# Altium PCB PCB_CSN_V5.PcbDoc
Units mm, origin at the board's own origin, x right, y up, seen from the top; angles counter-clockwise.
Board outline 50 x 20 mm, 4 copper layers (Top Layer, G1, GP1, Bottom Layer); 84 components, 60 nets, 232 pads, 34 vias.
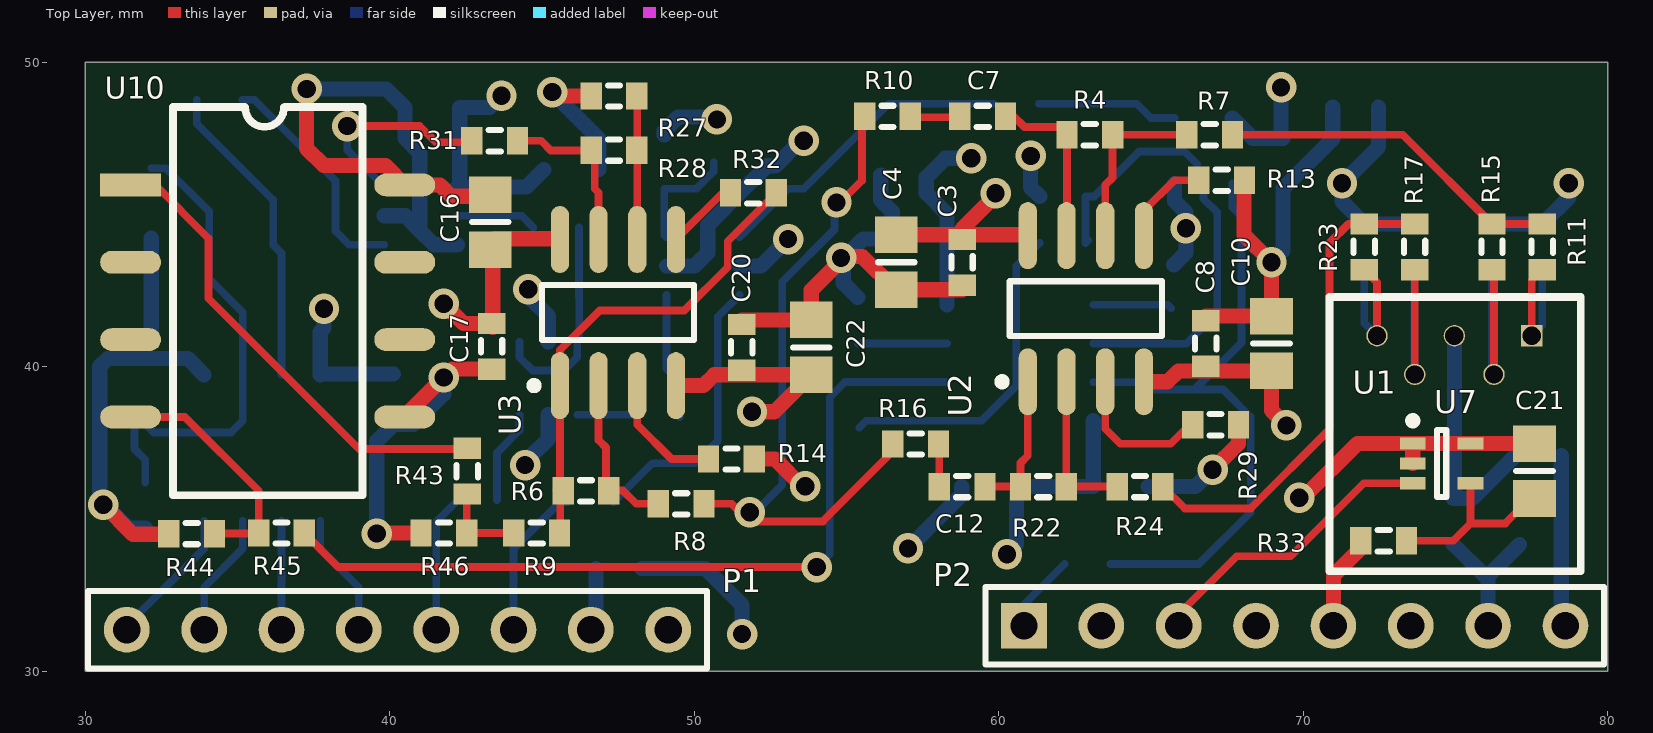
[diagram p0: Top Layer view]
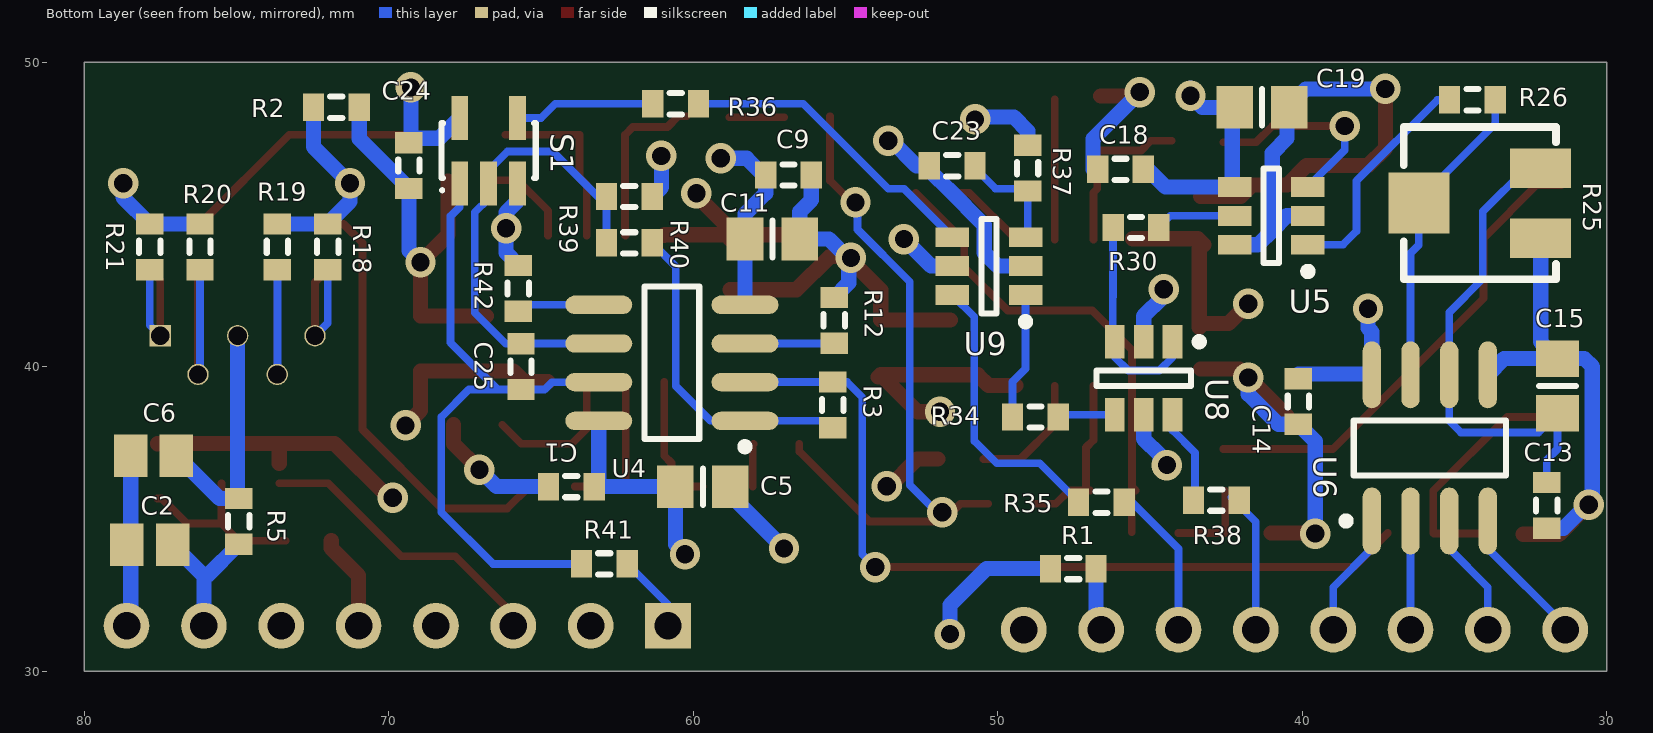
[diagram p1: Bottom Layer view, seen from below]
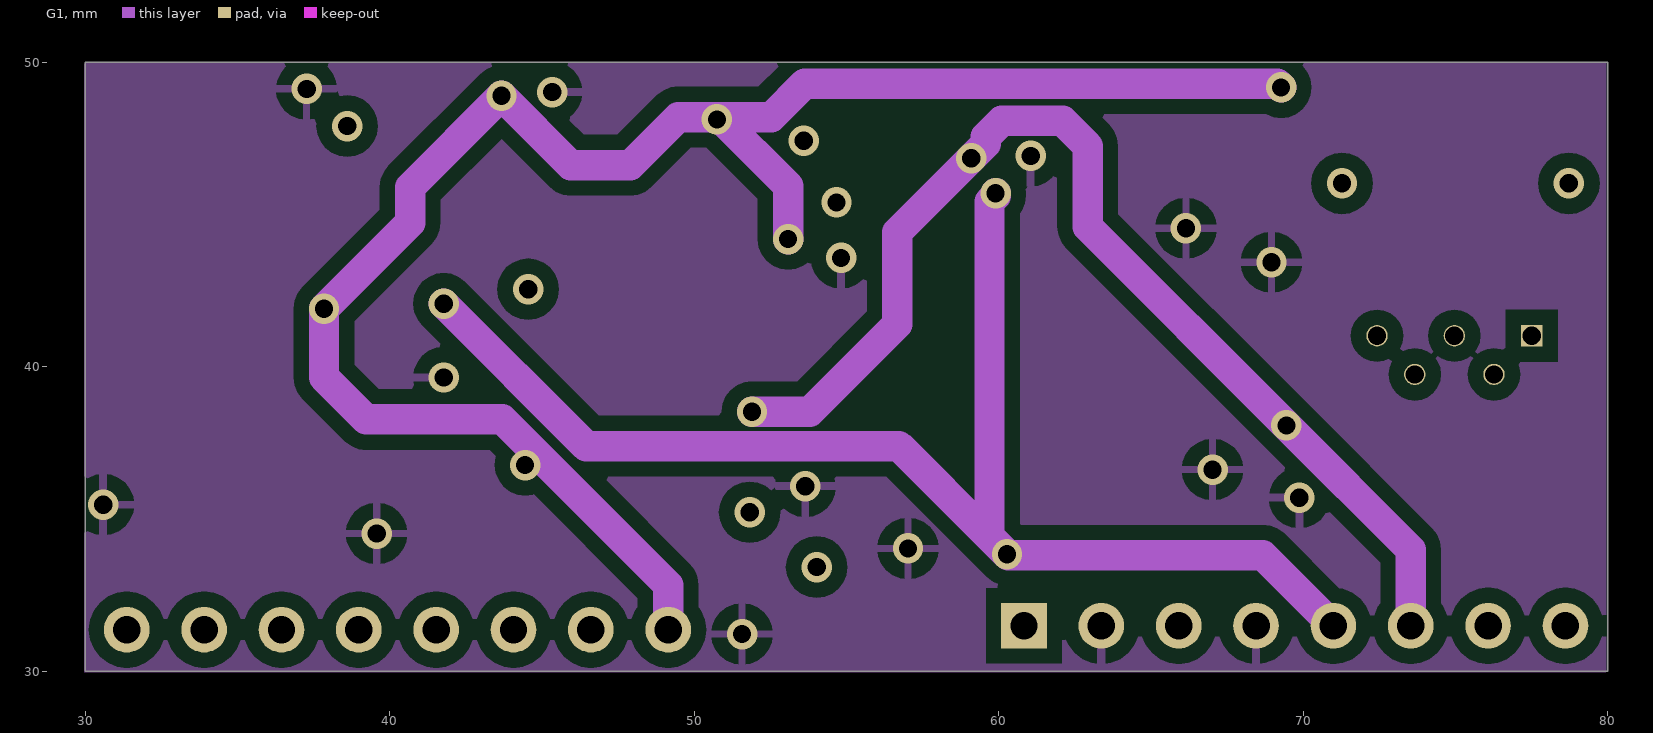
[diagram p2: G1]
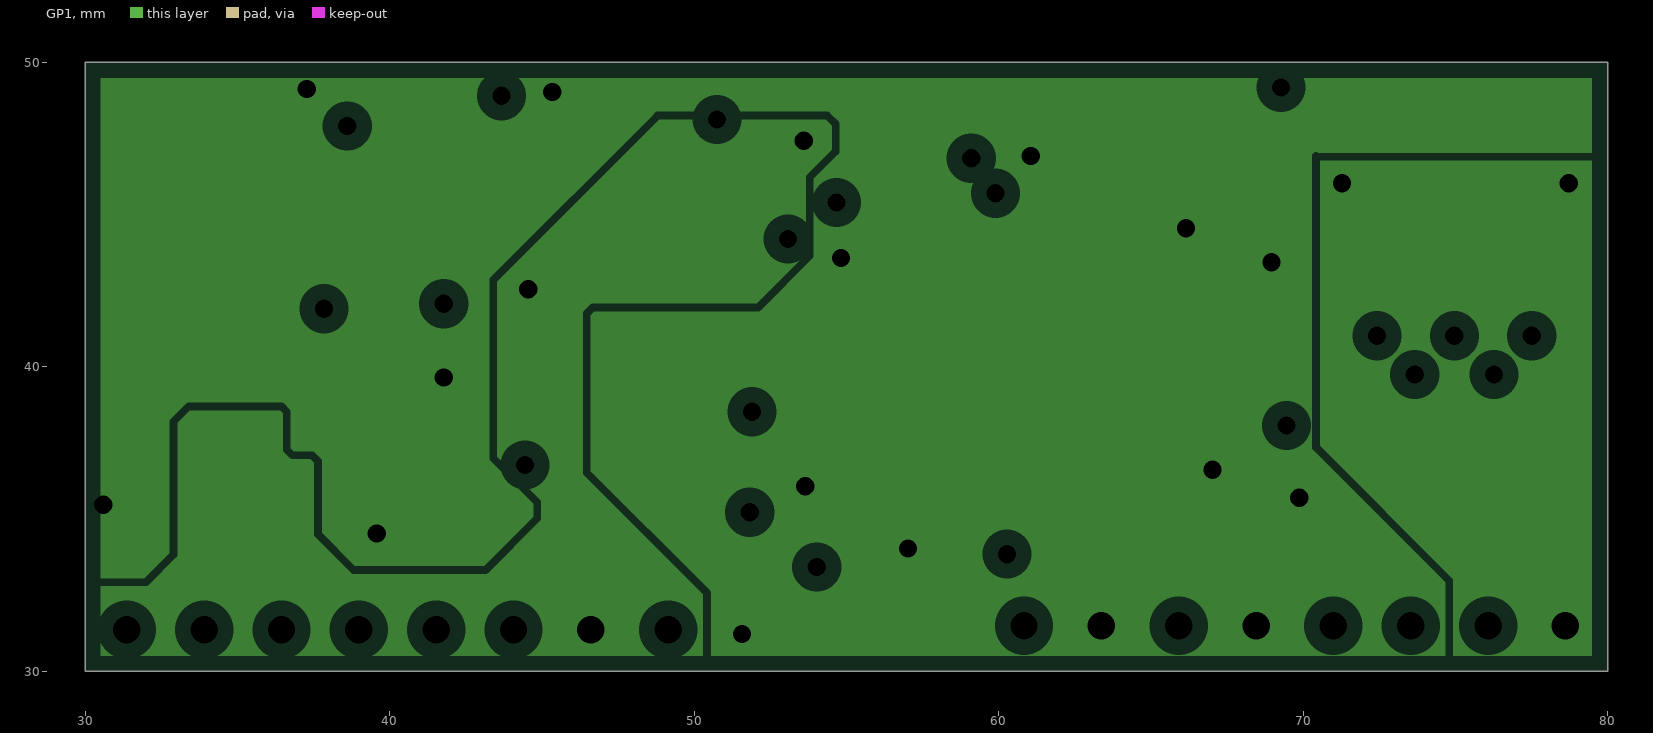
[diagram p3: GP1, clearances drawn from the general rule]

## Layer stack, top to bottom
Top Layer: signal copper 0.0356
Dielectric: core 0.32, FR-4, Dk 4.8
G1: signal copper 0.0356
Dielectric: prepreg 0.32, FR-4, Dk 4.8
GP1: plane copper 0.0356, net (Multiple Nets)
Dielectric: core 0.32, FR-4, Dk 4.8
Bottom Layer: signal copper 0.0356

## Board outline
30,30 30,50 80,50 80,30

## Design rules (kind name [scope] priority, off if disabled: settings)
Clearance Clearance_1 [InNamedPolygon('gnd_top')] p1: gap=0.5
Clearance [All] p2: gap=0.127
ComponentClearance ComponentClearance_1 [InComponentClass('Temp_Sens') vs InComponent('U1')] p1: gap=0 collisioncheckmode=3 verticalgap=0 showdistances=FALSE
ComponentClearance [All] p2: gap=0.254 collisioncheckmode=3 verticalgap=0.254 showdistances=FALSE
MinimumSolderMaskSliver MinimumSolderMaskSliver_1 [(HasFootprint('MAA05A_N') OR HasFootprint('SOT23-5') OR HasFootprint('SOT23-6_N'))] p1: minsoldermaskwidth=0.06
MinimumSolderMaskSliver [All] p2: minsoldermaskwidth=0.127
PlaneClearance [All] p1: clearance=0.508
PlaneConnect [All] p1: planeconnectstyle=Relief reliefexpansion=0.508 reliefentries=4 reliefconductorwidth=0.254 reliefairgap=0.254
PolygonConnect [All] p1: connectstyle=Relief reliefconductorwidth=0.254 reliefentries=4 polygonreliefangle="90 Angle"
RoutingVias [All] p1: holewidth=0.6 width=1 viastyle="Through Hole" minholewidth=0.6 minwidth=1 maxholewidth=0.6 maxwidth=1
SilkscreenOverComponentPads SilkscreenOverComponentPads_1 [(InPadClass('Pads_Res_Cond') OR HasFootprint('6-0805_N') OR HasFootprint('J1-0603')OR HasFootPrint('SOT23-5')) vs (OnLayer('Top Overlay') OR OnLayer('Bottom Overlay'))] p1: minsilkscreentomaskgap=0.06
SilkscreenOverComponentPads [All] p2: minsilkscreentomaskgap=0.254
SolderMaskExpansion SolderMaskExpansion_1 [(HasFootprint('SOT23-5') OR HasFootprint('MAA05A_N') OR HasFootprint('SOT23-6_N'))] p1: expansion=0.05
SolderMaskExpansion [All] p2: expansion=0.102
Width Width_1 [(InNet('-5') OR InNet('+3.3') OR InNet('+5') OR InNet('70_GND') OR InNet('+70V') OR InNet('DGND') OR InNet('GND')OR InNet('NetC6_2'))] p1: maxlimit=1 minlimit=0.5 preferedwidth=1 toplayer_maxwidth=0.5 toplayer_prefwidth=0.5 midlayer1_minwidth=1 bottomlayer_maxwidth=0.5 bottomlayer_prefwidth=0.5 minimp=50.000000 maximp=50.000000 favimp=50.000000
Width [All] p2: maxlimit=0.254 minlimit=0.254 preferedwidth=0.254
23 further rules are at their usual default settings.

## Classes and differential pairs
component class Logica_ADC: C23 C24 C25 P1 P2 R34 R35 R36 R37 R38 R39 R40 R41 R42 S1 U8 U9
component class Acond_Elec: C1 C2 C3 C4 C5 C6 C7 C8 C9 C10 C11 C12 C13 C14 C15 C16 C17 C18 C19 C20 C21 C22 R1 R2 R3 R4 R5 R6 R7 R8 R9 R10 R11 R12 R13 R14 R15 R16 R17 R18 R19 R20 R21 R22 R23 R24 R25 R26 R27 R28 R29 R30 R31 R32 R33 R43 R44 R45 R46 U1 U2 U3 U4 U5 U6 U7 U10
pad class Pads_Res_Cond: C1-1 C1-2 C2-1 C2-2 C3-1 C3-2 C4-1 C4-2 C5-1 C5-2 C6-1 C6-2 C7-1 C7-2 C8-1 C8-2 C9-1 C9-2 C10-1 C10-2 C11-1 C11-2 C12-1 C12-2 C13-1 C13-2 C14-1 C14-2 C15-1 C15-2 C16-1 C16-2 C17-1 C17-2 C18-1 C18-2 C19-1 C19-2 C20-1 C20-2 C21-1 C21-2 C22-1 C22-2 C23-1 C23-2 C24-1 C24-2 C25-1 C25-2 R1-1 R1-2 R2-1 R2-2 R3-1 R3-2 R4-1 R4-2 R5-1 R5-2 R6-1 R6-2 R7-1 R7-2 R8-1 R8-2 R9-1 R9-2 R10-1 R10-2 R11-1 R11-2 R12-1 R12-2 R13-1 R13-2 R14-1 R14-2 R15-1 R15-2 R16-1 R16-2 R17-1 R17-2 R18-1 R18-2 R19-1 R19-2 R20-1 R20-2 R21-1 R21-2 R22-1 R22-2 R23-1 R23-2 R24-1 R24-2 R25-CCW R25-CW R25-W R26-1 R26-2 R27-1 R27-2 R28-1 R28-2 R29-1 R29-2 R30-1 R30-2 R31-1 R31-2 R32-1 R32-2 R33-1 R33-2 R34-1 R34-2 R35-1 R35-2 R36-1 R36-2 R37-1 R37-2 R38-1 R38-2 R39-1 R39-2 R40-1 R40-2 R41-1 R41-2 R42-1 R42-2 R43-1 R43-2 R44-1 R44-2 R45-1 R45-2 R46-1 R46-2

## Components (designator, comment, footprint, x,y, rotation, side; value= is the part's Value field where it differs from the comment)
C1 "Cap" J1-0603 64.008,36.068 r180 bottom
C2 "Cap" C0805 77.851,34.163 r180 bottom
C3 "Cap" J1-0603 58.801,43.434 r90 top
C4 "Cap Pol3" 6-0805_N 56.642,43.434 r270 top
C5 "Cap Pol3" 6-0805_N 59.69,36.068 r180 bottom
C6 "Cap" C0805 77.724,37.084 r180 bottom
C7 "Cap" J1-0603 59.475,48.225 r180 top
C8 "Cap" J1-0603 66.802,40.767 r270 top
C9 "Cap" J1-0603 56.875,46.3 r180 bottom
C10 "Cap Pol3" 6-0805_N 68.961,40.767 r270 top
C11 "Cap Pol3" 6-0805_N 57.404,44.196 r0 bottom
C12 "Cap" J1-0603 58.801,36.068 r180 top
C13 "Cap" J1-0603 31.975,35.45 r270 bottom
C14 "Cap" J1-0603 40.132,38.862 r270 bottom
C15 "Cap Pol3" 6-0805_N 31.623,39.37 r90 bottom
C16 "Cap Pol3" 6-0805_N 43.3,44.75 r90 top
C17 "Cap" J1-0603 43.35,40.675 r90 top
C18 "Cap" J1-0603 45.974,46.482 r180 bottom
C19 "Cap Pol3" 6-0805_N 41.325,48.525 r180 bottom
C20 "Cap" J1-0603 51.562,40.64 r90 top
C21 "Cap" 6-0805_N 77.597,36.576 r270 top
C22 "Cap Pol3" 6-0805_N 53.848,40.64 r270 top
C23 "Cap" J1-0603 51.5,46.6 r180 bottom
C24 "Cap" J1-0603 69.342,46.609 r90 bottom
C25 "Cap" J1-0603 65.659,40.005 r270 bottom
P1 "Header 8" HDR1X8#1 31.369,31.369 r0 top
P2 "Header 8" HDR1X8#2 60.833,31.496 r0 top
R1 "Res3" J1-0603 47.525,33.375 r180 bottom
R2 "Res3" J1-0603 71.725,48.525 r0 bottom
R3 "Res3" J1-0603 55.425,38.75 r270 bottom
R4 "Res3" J1-0603 62.992,47.625 r0 top
R5 "Res3" J1-0603 74.93,34.925 r270 bottom
R6 "Res3" J1-0603 46.45,35.925 r0 top
R7 "Res3" J1-0603 66.929,47.625 r180 top
R8 "Res3" J1-0603 49.575,35.5 r180 top
R9 "Res3" J1-0603 44.831,34.544 r180 top
R10 "Res3" J1-0603 56.35,48.225 r180 top
R11 "Res3" J1-0603 77.851,43.942 r90 top
R12 "Res3" J1-0603 55.372,41.529 r270 bottom
R13 "Res3" J1-0603 67.325,46.125 r180 top
R14 "Res3" J1-0603 51.225,36.975 r180 top
R15 "Res3" J1-0603 76.2,43.942 r90 top
R16 "Res3" J1-0603 57.277,37.465 r180 top
R17 "Res3" J1-0603 73.66,43.942 r90 top
R18 "Res3" J1-0603 72.009,43.942 r270 bottom
R19 "Res3" J1-0603 73.66,43.942 r270 bottom
R20 "Res3" J1-0603 76.2,43.942 r270 bottom
R21 "Res3" J1-0603 77.851,43.942 r270 bottom
R22 "Res3" J1-0603 61.468,36.068 r0 top
R23 "Res3" J1-0603 72.009,43.942 r90 top
R24 "Res3" J1-0603 64.643,36.068 r180 top
R25 "RPot SM" POT4MM-2 34.175,45.375 r0 bottom
R26 "Res3" J1-0603 34.417,48.768 r180 bottom
R27 "Res3" J1-0603 47.371,48.895 r180 top
R28 "Res3" J1-0603 47.371,47.117 r180 top
R29 "Res3" J1-0603 67.125,38.1 r180 top
R30 "Res3" J1-0603 45.466,44.577 r180 bottom
R31 "Res3" J1-0603 43.45,47.425 r180 top
R32 "Res3" J1-0603 51.943,45.72 r180 top
R33 "Res3" J1-0603 72.644,34.29 r180 top
R34 "Res3" J1-0603 48.768,38.354 r0 bottom
R35 "Res3" J1-0603 46.6,35.55 r180 bottom
R36 "Res3" J1-0603 60.579,48.641 r0 bottom
R37 "Res3" J1-0603 49.025,46.525 r90 bottom
R38 "Res3" J1-0603 42.825,35.625 r0 bottom
R39 "Res3" J1-0603 62.103,45.593 r180 bottom
R40 "Res3" J1-0603 62.103,44.069 r0 bottom
R41 "Res3" J1-0603 62.925,33.528 r180 bottom
R42 "Res3" J1-0603 65.75,42.575 r270 bottom
R43 "Res3" J1-0603 42.55,36.575 r90 top
R44 "Res3" J1-0603 33.5,34.525 r0 top
R45 "Res3" J1-0603 36.449,34.544 r0 top
R46 "Res3" J1-0603 41.783,34.544 r0 top
S1 "SN74LVC1G66DBVR" SOT23-5 66.725,47.1 r180 bottom (schematic designator Switch1)
U1 "MPPC_S10985" S10985_HAM 70.866,42.291 r0 top
U2 "THS4062" SO-8_N 62.865,41.91 r90 top
U3 "THS4062" SO-8_N 47.498,41.783 r90 top
U4 "THS4062" SO-8_N 60.706,40.132 r0 bottom
U5 "TLV3501" SOT23-6_N 41.021,44.958 r0 bottom
U6 "TLV5624" SO8_N 35.814,37.338 r90 bottom
U7 "LM94021BIMG" MAA05A_N 74.549,36.83 r0 top
U8 "SN74LVC2G17" SOT23-6_N 45.212,39.624 r270 bottom
U9 "SN74LVC1G175" SOT23-6_N 50.292,43.307 r0 bottom
U10 "Delay" AMZ-G-SMD 31.496,45.974 r0 top

## Footprints (in the part's own frame and the unit in brackets; to place one, negate y for a bottom-side part, rotate by r counter-clockwise, add the part's x,y. Pads: shape width x height; smd on the part's side, far side on the other; paste and mask are expansions set on the pad)
6-0805_N [mm] "Chip Resistor, Body 2.0x1.2mm, IPC Medium Density"
  rect 1.2x1.4 smd: 1(-0.9,0) 2(0.9,0)
  silkscreen extent 0,-0.6 0,0.6, body extent -1.07,-0.7 1.07,0.7, height 0.7
AMZ-G-SMD [mm]
  rect 2x0.75 smd: 1(0,0)
  oval 2x0.75 smd: 2(0,-2.54) 3(0,-5.08) 4(0,-7.62) 5(9,-7.62) 6(9,-5.08) 7(9,-2.54) 8(9,0)
  silkscreen extent 1.39,-10.19 7.61,2.56
C0805 [mm] "Chip Capacitor, Body 2.0x1.3mm, IPC High Density"
  rect 1.1x1.4 smd: 1(-0.75,0) 2(0.75,0)
  body extent -1.1,-0.72 1.1,0.72, height 1.4
HDR1X8#1 [mm] "Connector; Header; 8 Position"
  round 1.5 hole 0.9: 1(0,0) 2(2.54,0) 3(5.08,0) 4(7.62,0) 5(10.16,0) 6(12.7,0) 7(15.24,0) 8(17.78,0)
  silkscreen extent -1.27,-1.27 19.05,1.27
HDR1X8#2 [mm] "Connector; Header; 8 Position"
  rect 1.5x1.5 hole 0.9: 1(0,0)
  round 1.5 hole 0.9: 2(2.54,0) 3(5.08,0) 4(7.62,0) 5(10.16,0) 6(12.7,0) 7(15.24,0) 8(17.78,0)
  silkscreen extent -1.27,-1.27 19.05,1.27
J1-0603 [mm] "Chip Resistor, Body 1.6x0.8mm, IPC High Density"
  rect 0.7x0.9 smd: 1(-0.75,0) 2(0.75,0)
  silkscreen extent -0.2,-0.35 0.2,0.35, body extent -0.85,-0.48 0.85,0.48, height 0.9
MAA05A_N [mm] "SOT353, 5-Leads, Body 2x1.3mm, Pitch 0.65mm, Lead Span 2.1mm, IPC Medium Density"
  rect 0.85x0.4 smd: 1(-0.95,0.65) 2(-0.95,0) 3(-0.95,-0.65) 4(0.95,-0.65) 5(0.95,0.65)
  silkscreen extent -1.07,-1.1 0.15,1.52, body extent -0.7,-1.1 0.7,1.1, height 1.1
POT4MM-2 [mm] "Square Trimming Potentiometer"
  rect 2x1.3 smd: CCW(-2,-1.15) CW(-2,1.15)
  rect 2x2 smd: W(2,0)
  silkscreen extent -2.5,-2.5 2.5,2.5
S10985_HAM [mm]
  rect 0.7x0.7 hole 0.6: 1(6.64,-1.27)
  round 0.7 hole 0.6: 2(5.4,-2.54) 3(4.1,-1.27) 4(2.8,-2.54) 5(1.56,-1.27)
  silkscreen extent 0,-9 8.25,0
SO8_N [mm] "SOIC, 8-Leads, Body 4.9x3.9mm, Pitch 1.27mm, IPC Medium Density"
  oval 2.2x0.6 smd: 1(-2.4,1.905) 2(-2.4,0.635) 3(-2.4,-0.635) 4(-2.4,-1.905) 5(2.4,-1.905) 6(2.4,-0.635) 7(2.4,0.635) 8(2.4,1.905)
  silkscreen extent -2.52,-2.5 0.9,2.88, body extent -2,-2.5 2,2.5, height 1.75
SO-8_N [mm] "SOIC, 8-Leads, Body 4.9x3.9mm, Pitch 1.27mm, IPC Medium Density"
  oval 2.2x0.6 smd: 1(-2.4,1.905) 2(-2.4,0.635) 3(-2.4,-0.635) 4(-2.4,-1.905) 5(2.4,-1.905) 6(2.4,-0.635) 7(2.4,0.635) 8(2.4,1.905)
  silkscreen extent -2.52,-2.5 0.9,2.88, body extent -1.95,-2.45 1.95,2.45, height 1.75
SOT23-5 [mm] "SOT-23/SC-74A; 5 Leads; Body 3 x 3 mm, inc. leads (LxW max)"
  rect 0.55x1.45 smd: 1(-0.95,-1.075) 2(0,-1.075) 3(0.95,-1.075) 4(0.95,1.075) 5(-0.95,1.075)
  silkscreen extent -1.58,-1.35 1.55,0.9
SOT23-6_N [mm] "SOT23, 6-Leads, Body 2.9x1.6mm, Pitch 0.95mm, Lead Span 2.7mm, IPC Medium Density"
  rect 1.1x0.65 smd: 1(-1.2,0.95) 2(-1.2,0) 3(-1.2,-0.95) 4(1.2,-0.95) 5(1.2,0) 6(1.2,0.95)
  silkscreen extent -1.32,-1.55 0.25,1.95, body extent -0.9,-1.55 0.9,1.55, height 1.45

## Part data
C1 C2 C3 C6 C7 C8 C9 C12 C13 C14 C17 C18 C20 C21 C23 C24 C25: "Capacitor"
C4 C5 C10 C11 C15 C16 C19 C22: "Polarized Capacitor (Surface Mount)"
P1 P2: "Header, 8-Pin"
R1 R2 R3 R4 R5 R6 R7 R8 R9 R10 R11 R12 R13 R14 R15 R16 R17 R18 R19 R20 R21 R22 R23 R24 R26 R27 R28 R29 R30 R31 R32 R33 R34 R35 R36 R37 R38 R39 R40 R41 R42 R43 R44 R45 R46: "Resistor"
R25: "Square Trimming Potentiometer"
U2 U3 U4: library part AD8002AR, "Dual 600MHz, 50mW Current Feedback Amplifier"
U5: "Analog Comparator"
U6: "DAC, internal reference, SPI"
U7: "Multi-Gain Analog Temperature Sensor, 5-pin SC-70"
U8: "Schmitt Buffer 2 gates"
U9: "D-type flip-flop with clear"
U10: library part AMZ-601G

## Via types
v1: diameter 1, hole 0.6, Top Layer to Bottom Layer, 34 vias

## Nets (pads, with @x,y where several pads share a name; then routed paths per layer and width w, separated by ;. In a path a pad name is that pad's centre, name@x,y a point inside that pad or via, vN(x,y) a via of type N, cw(c..) or ccw(c..) an arc to the next point about the centre after c; other vN are vias at no path point)
70_GND: C2.1 C6.1 P2.8 R2.2 R18.1 R19.1 R20.1 R21.1 | length 15.3
  Bottom Layer w0.5: R2.2 72.475,47.225 v1(71.275,46.025) 71.275,45.426 R18.1 R19.1 ; R20.1 R21.1 78.725,45.566 v1(78.725,46.025) ; C6.1 78.474,31.635 P2.8
+3.3: C14.1 C18.2 C19.1 C24.2 P1.8 R37.2 S1.5 U5.4 U6.8 U8.5 U9.5 | length 81.8
  G1 w1: P1.8 49.149,32.826 43.7,38.275 39.225,38.275 37.846,39.654 v1(37.846,41.91) 40.675,44.739 40.675,45.9 v1(43.675,48.9) 45.95,46.625 47.9,46.625 49.475,48.2 52.531,48.2 53.633,49.302 69.148,49.302 v1(69.275,49.175) ; v1@50.825,48.2 53.086,45.939 v1(53.086,44.196)
  Bottom Layer w0.5: v1(37.846,41.91) 37.846,41.275 37.719,41.148 U6.8 37.743,39.762 C14.1@40.132,39.762 ; v1@43.675,49.15 v1(43.675,48.9) 43.289,48.514 42.302,48.514 42.302,45.989 U5.4 44.5,45.908 C18.2@45.074,46.482 ; v1(44.45,36.775) 44.65,36.775 44.675,36.8 44.675,37.1 45.212,37.637 U8.5 ; R37.2@49.022,47.613 49.022,47.747 49.475,48.2 50.675,48.2 v1(50.75,48.125) ; U9.5 52.197,43.307 v1(53.086,44.196) ; S1.5 68.341,47.509 69.342,47.509 69.275,47.576 v1(69.275,49.175)
+5: C1.2 C3.2 C4.1 C5.1 C16.1 C17.2 P2.5 R33.2 U2.8 U3.8 U4.8 | length 68.5
  Top Layer w0.5: v1(41.775,42.075) 42.425,41.425 C17.2 ; C17.2@43.384,41.302 43.384,43.866 43.239,44.011 43.434,44.207 U3.8@45.569,44.207 ; C4.1 C3.2@58.801,44.334 ; C3.2 C3.2@58.801,44.334 ; v1(59.9,45.7) 59.9,45.625 58.801,44.526 C3.2@58.801,44.334 ; U2.8 60.936,44.334 C3.2@58.801,44.334 ; P2.5 70.993,33.147 71.894,34.048 R33.2
  G1 w1: v1(41.775,42.075) 46.452,37.398 56.727,37.398 59.7,34.425 ; v1(59.9,45.7) 59.9,45.625 59.7,45.425 59.7,34.425 ; P2.5 68.675,33.814 60.311,33.814 v1(60.275,33.85) 59.7,34.425
  Bottom Layer w0.5: v1(60.275,33.85) 60.59,34.165 C5.1 63.108,36.068 63.108,38.225 U4.8
+70V: C2.2 P2.7 R5.2 | length 4.7
  Bottom Layer w0.5: R5.2 75.97,33.135 76.073,33.135 ; P2.7 76.073,33.135 ; C2.2 76.073,33.135
-5: C8.2 C9.1 C10.2 C11.2 C20.1 C22.2 P2.6 U2.4 U3.4 U4.4 | length 57.1
  Top Layer w0.5: U3.4 50.305,39.383 50.662,39.74 C22.2 ; v1(51.9,38.525) 52.633,38.525 C22.2 ; C22.2@53.925,39.663 C22.2 ; U2.4 65.545,39.51 65.902,39.867 C10.2 68.961,38.564 v1(69.45,38.075)
  G1 w1: v1(51.9,38.525) 53.8,38.525 56.675,41.4 56.675,44.425 59.575,47.325 59.575,47.55 60.1,48.075 62.1,48.075 62.925,47.25 62.925,44.6 v1(69.45,38.075) 73.533,33.992 P2.6
  Bottom Layer w0.5: U4.4 58.304,42.039 58.304,45.021 57.625,45.7 57.625,46.225 58.25,46.85 v1(59.1,46.85)
DGND: C23.1 P1.7 R1.2 U8.2 U9.2 | length 10.9
  Bottom Layer w0.5: v1@44.6,42.275 45.212,41.663 U8.2 ; P1.7 46.775,31.535 R1.2 ; U9.2 50.007,43.307 50.45,43.75 50.45,44.66 51.64,45.85 ; 51.375,45.585 52.39,46.6 52.675,46.6 53.5,47.425 v1(53.6,47.425)
  other v1: 44.55,42.55
GND: C1.1 C3.1 C4.2 C5.2 C8.1 C9.2 C10.1 C11.1 C13.2 C14.2 C15.2 C16.2 C17.1 C18.1 C19.2 C20.2 C21.1 C22.1 C24.1 P2.2 P2.4 R1.1 R2.1 R12.1 R13.1 R14.1 R25.CW R27.2 R29.1 R39.2 R42.1 R44.1 R46.1 S1.3 U5.2 U5.6 U6.5 U7.1 U7.2 U7.5 U10.5 U10.8 | length 107.2
  Top Layer w0.5: v1(30.6,35.475) 31.575,34.5 R44.1@32.75,34.5 ; v1(37.275,49.125) 37.275,47.175 37.841,46.609 39.861,46.609 U10.8 41.651,45.974 42.025,45.6 C16.2@43.35,45.6 ; v1(39.575,34.525) 39.594,34.544 R46.1 ; U10.5 40.496,38.371 v1(41.775,39.65) 41.775,39.633 42.067,39.925 C17.1 ; v1(45.339,49.022) 45.466,48.895 R27.2 ; C20.2@51.562,41.54 C22.1 53.848,42.523 54.95,43.625 55.518,43.625 56.609,42.534 C4.2 C3.1@58.801,42.534 ; R14.1 52.65,36.975 53.6,36.025 53.713,35.913 53.875,36.075 v1(53.65,36.075) ; C8.1@66.802,41.667 C10.1 v1(68.961,43.434) 68.06,44.335 R13.1@68.06,46.1 ; v1(67.025,36.625) 67.875,37.475 R29.1 ; v1(69.875,35.7) 70,35.7 71.78,37.48 U7.1 ; U7.2 U7.1 ; C21.1 77.593,37.48 U7.5 U7.1
  Bottom Layer w0.5: C13.2 31.423,34.7 30.48,35.643 30.48,40.005 30.745,40.27 C15.2 ; R25.CW 32.175,40.822 C15.2 ; U6.5 33.377,40.27 C15.2 ; v1(37.275,49.125) 39.891,49.125 40.502,48.514 40.502,47.509 40.988,47.023 40.988,44.483 ; v1(39.575,34.525) 39.575,37.555 C14.2 40.787,38.112 41.775,39.1 v1(41.775,39.65) ; U5.2 40.513,44.958 40.988,44.483 ; U5.6 41.463,44.008 40.988,44.483 ; v1(45.339,49.022) 46.874,47.487 C18.1@46.874,46.482 ; R1.1 50.375,33.375 51.575,32.175 v1(51.575,31.225) ; R12.1 54.9,42.751 54.9,43.55 55.546,44.196 C11.1 56.504,45.096 56.125,45.475 C9.2 ; v1(57.023,34.036) 58.79,35.803 C5.2 ; v1(61.05,46.925) 61.05,45.896 R39.2 ; C1.1@64.908,36.068 66.468,36.068 v1(67.025,36.625) ; R42.1@65.75,43.35 66.15,43.75 v1(66.15,44.55) 66.15,45.067 65.775,45.442 S1.3 ; v1(68.961,43.434) 69.342,43.815 C24.1@69.342,45.709 ; C24.1 70.975,47.492 R2.1
  other v1: 54.825,43.575
NetC6_2: C6.2 R5.1 U1.3 | length 7.9
  Bottom Layer w0.5: R5.1 75.565,35.675 C6.2 ; R5.1@74.966,35.747 U1.3
NetC7_1: C7.1 R4.1 U2.7 | length 5.6
  Top Layer w0.254: C7.1 60.5,48.225 60.85,47.875 61.992,47.875 R4.1 62.242,44.322 U2.7
NetC7_2: C7.2 R10.1 | length 1.8
  Top Layer w0.254: R10.1@57.011,48.2 C7.2@58.813,48.2
NetC12_1: C12.1 R22.1 U2.1 | length 4.6
  Top Layer w0.254: C12.1@59.69,36.068 R22.1 60.718,36.842 60.96,37.084 U2.1
NetC12_2: C12.2 R16.1 | length 1.4
  Top Layer w0.254: R16.1 58.051,37.441 C12.2
NetC13_1: C13.1 C15.1 R25.CCW U6.6 | length 16.2
  Bottom Layer w0.254: C13.1 31.975,36.95 31.623,37.302 C15.1 32.247,37.846 34.798,37.846 35.179,38.227 U6.6 35.179,41.783 34.075,42.887 34.075,45.1 32.65,46.525 R25.CCW
NetC21_2: C21.2 R33.1 U7.4 | length 6.1
  Top Layer w0.254: R33.1 74.93,34.29 75.499,34.859 ; U7.4 75.499,34.859 ; C21.2 77.459,35.676 76.642,34.859 75.499,34.859
NetC23_2: C23.2 R37.1 U9.3 | length 3.8
  Bottom Layer w0.254: U9.3 49.022,44.327 49.022,45.85 50.075,45.85 50.644,46.419 C23.2@50.644,46.707
NetC25_1: C25.1 R39.1 R40.2 S1.2 U4.6 | length 15
  Bottom Layer w0.254: R40.2@62.937,44.153 R40.2 R39.1 63.143,45.593 64.625,47.075 66.1,47.075 S1.2@66.525,46.65 ; U4.6 C25.1@65.647,40.767 ; C25.1 66.155,40.755 67.175,41.775 67.175,45.075 66.725,45.525 S1.2
NetC25_2: C25.2 R41.1 S1.1 U4.7 | length 22.4
  Bottom Layer w0.254: U4.7 64.643,39.497 64.885,39.255 C25.2 ; R41.1 66.578,33.528 68.275,35.225 68.275,38.35 67.37,39.255 C25.2 ; S1.1 67.675,45.25 67.975,44.95 67.975,40.797 66.433,39.255 C25.2
NetP1_1: P1.1 U6.4 | length 4.6
  Bottom Layer w0.254: P1.1 31.369,31.496 33.909,34.036 U6.4
NetP1_2: P1.2 U6.3 | length 4.1
  Bottom Layer w0.254: P1.2 33.909,32.766 35.179,34.036 U6.3
NetP1_3: P1.3 U6.2 | length 3.6
  Bottom Layer w0.254: P1.3 U6.2
NetP1_4: P1.4 U6.1 | length 4.1
  Bottom Layer w0.254: U6.1 37.719,34.036 38.989,32.766 P1.4
NetP1_5: P1.5 R38.1 | length 4.7
  Bottom Layer w0.254: P1.5 41.529,34.913 R38.1@42.333,35.717
NetP1_6: P1.6 R35.2 | length 5.1
  Bottom Layer w0.254: P1.6 44.069,34.024 45.595,35.55 R35.2
NetP2_1: P2.1 R41.2 | length 2.6
  Bottom Layer w0.254: P2.1 60.845,31.508 60.845,32.198 R41.2
NetP2_3: P2.3 U7.3 | length 9.8
  Top Layer w0.254: P2.3 65.913,31.877 67.818,33.782 69.596,33.782 71.994,36.18 U7.3
NetR3_1: R3.1 R45.2 U4.2 | length 27.1
  Top Layer w0.254: R45.2 38.318,33.425 v1(54.025,33.425)
  Bottom Layer w0.254: v1(54.025,33.425) 54.45,33.85 54.45,39 54.95,39.5 U4.2@58.294,39.5 ; U4.2@58.294,39.485 U4.2
NetR3_2: R3.2 R40.1 U4.1 | length 10.7
  Bottom Layer w0.254: R3.2 55.652,38.227 U4.1 59.436,38.227 60.579,39.37 60.579,43.295 R40.1
NetR4_2: R4.2 R7.2 U2.6 | length 5.9
  Top Layer w0.254: U2.6 63.5,45.974 63.742,46.216 R4.2 R7.2
NetR6_1: R6.1 R9.1 R32.1 U3.1 | length 15.8
  Top Layer w0.254: R6.1@45.478,35.941 45.593,36.056 U3.1 45.593,40.543 46.9,41.85 47.747,41.85 49.675,41.85 51.1,43.275 51.1,44.127 R32.1 ; R9.1@45.605,34.568 R6.1@45.605,35.941
NetR6_2: R6.2 R8.2 U3.2 | length 5.6
  Top Layer w0.254: U3.2 46.863,37.592 47.105,37.35 R6.2@47.105,35.941 ; R6.2@46.978,35.941 47.659,35.941 48.1,35.5 R8.2
NetR7_1: R7.1 R11.2 R15.2 | length 11.4
  Top Layer w0.254: R7.1 73.267,47.625 R15.2 R11.2
NetR8_1: R8.1 R10.2 R16.2 | length 22.4
  Top Layer w0.254: R8.1 51.229,35.5 51.804,34.925 54.229,34.925 56.527,37.223 R16.2 ; v1@54.864,45.212 54.864,45.466 55.511,46.113 R10.2@55.511,48.225
  Bottom Layer w0.254: v1(51.825,35.225) 52,35.225 52.896,36.121 52.896,42.796 54.61,44.51 54.61,45.212 v1@54.864,45.212
  other v1: 54.676,45.4
NetR9_2: R9.2 R43.1 R46.2 | length 2.9
  Top Layer w0.254: R43.1@42.533,35.929 R46.2 R9.2
NetR11_1: R11.1 R21.2 U1.1 | length 4.6
  Top Layer w0.254: U1.1 77.506,42.847 R11.1
  Bottom Layer w0.254: U1.1 77.851,41.366 R21.2
NetR12_2: R12.2 U4.3 | length 2.9
  Bottom Layer w0.254: R12.2@55.384,40.767 U4.3
NetR13_2: R13.2 U2.5 | length 3.1
  Top Layer w0.254: U2.5 64.77,45.12 65.775,46.125 R13.2@66.6,46.125
NetR14_2: R14.2 U3.3 | length 4.1
  Top Layer w0.254: U3.3 48.133,38.1 49.258,36.975 R14.2
NetR15_1: R15.1 R20.2 U1.2 | length 6.8
  Top Layer w0.254: U1.2 R15.1@76.266,43.126
  Bottom Layer w0.254: R20.2 76.2,39.817 U1.2
NetR17_1: R17.1 R19.2 U1.4 | length 6.9
  Top Layer w0.254: R17.1 73.666,43.186 U1.4
  Bottom Layer w0.254: R19.2 73.66,39.757 U1.4
NetR17_2: R17.2 R23.2 R24.1 | length 16
  Top Layer w0.254: R24.1 66.111,35.35 68.275,35.35 70.866,37.941 70.866,44.069 71.489,44.692 R23.2 R17.2
NetR18_2: R18.2 R23.1 U1.5 | length 4.7
  Top Layer w0.254: R23.1 72.426,42.775 U1.5
  Bottom Layer w0.254: R18.2 72.009,41.438 U1.5
NetR22_2: R22.2 R24.2 U2.2 | length 5.1
  Top Layer w0.254: U2.2 62.218,39.498 R22.2 R24.2
NetR25_W: R25.W R26.2 U6.7 | length 10.2
  Bottom Layer w0.254: R26.2 33.667,47.983 36.175,45.475 R25.W 36.175,44 36.449,43.726 U6.7
NetR26_1: R26.1 U5.1 | length 7.6
  Bottom Layer w0.254: R26.1 35.56,48.768 38.227,46.101 38.227,44.45 38.669,44.008 U5.1
NetR27_1: R27.1 R28.1 U3.6 | length 4.6
  Top Layer w0.254: U3.6 R27.1@48.133,48.78
NetR28_2: R28.2 R31.1 U3.7 | length 5.6
  Top Layer w0.254: R31.1@44.3,47.425 44.975,47.425 45.295,47.105 R28.2@46.736,47.105 ; R28.2@46.748,47.117 R28.2@46.736,47.105 ; U3.7 46.863,45.72 46.736,45.847 R28.2@46.736,47.105
NetR29_2: R29.2 U2.3 | length 4.8
  Top Layer w0.254: U2.3 63.5,37.973 63.998,37.475 65.65,37.475 R29.2@66.275,38.1
NetR30_1: R30.1 U8.1 U8.3 | length 7.1
  Bottom Layer w0.254: U8.1 44.262,40.32 44.704,39.878 45.72,39.878 46.162,40.32 U8.3 46.228,40.89 46.228,42.291 46.216,42.303 R30.1
NetR30_2: R30.2 U5.5 | length 2.7
  Bottom Layer w0.254: U5.5 44.335,44.958 R30.2
NetR31_2: R31.2 U5.3 | length 6.7
  Top Layer w0.254: v1(38.608,47.906) 40.994,47.906 41.525,47.375 R31.2@42.6,47.375
  Bottom Layer w0.254: v1(38.608,47.906) 38.608,47.121 U5.3
NetR32_2: R32.2 U3.5 | length 2.4
  Top Layer w0.254: U3.5 50.94,45.72 R32.2
NetR34_1: R34.1 U8.4 | length 1.8
  Bottom Layer w0.254: U8.4 R34.1@47.948,38.424
NetR34_2: R34.2 U9.1 | length 4.2
  Bottom Layer w0.254: U9.1 49.092,39.935 49.518,39.509 R34.2
NetR35_1: R35.1 U9.6 | length 9.3
  Bottom Layer w0.254: R35.1 48.63,36.83 50.038,36.83 50.775,37.567 50.775,41.64 U9.6
NetR36_1: R36.1 U9.4 | length 10.2
  Bottom Layer w0.254: U9.4 53.082,45.847 53.597,45.847 56.391,48.641 R36.1
NetR36_2: R36.2 S1.4 | length 4.6
  Bottom Layer w0.254: R36.2 64.534,48.641 65,48.175 S1.4
NetR38_2: R38.2 U8.6 | length 3.1
  Bottom Layer w0.254: R38.2@43.525,35.625 43.525,37.175 44.262,37.912 U8.6
NetR42_2: R42.2 U4.5 | length 2.6
  Bottom Layer w0.254: U4.5 65.544,42.037 R42.2@65.659,41.922
NetR43_2: R43.2 U10.1 | length 15.9
  Top Layer w0.254: U10.1 32.301,45.974 34.05,44.225 34.05,42.25 39,37.3 R43.2@42.6,37.3
NetR44_2: R44.2 R45.1 U10.4 | length 8
  Top Layer w0.254: U10.4 33.274,38.354 35.699,35.929 R45.1 35.68,34.525 R44.2
pads on no net: U10.2 U10.3 U10.6 U10.7

## Polygon pours and split planes (outlines as drawn)
GND on G1 "gnd_top" (solid, remove dead copper, pour order 4): 30,49.975 29.975,49.95 29.975,29.975 79.975,29.975 79.95,30 79.95,49.975
DGND on GP1 (split plane): 54.521,47.921 54.521,47.129 53.708,46.317 53.68,46.275 53.671,46.225 53.671,45.75 53.671,43.704 52.046,42.079 46.675,42.079 46.625,42.07 46.583,42.042 46.383,41.842 46.355,41.8 46.346,41.75 46.346,36.525 46.355,36.475 46.383,36.433 50.233,32.583 50.296,32.521 50.296,30.51 30.51,30.51 30.51,32.796 32,32.796 32.05,32.805 32.092,32.833 32.992,33.733 33.02,33.775 33.029,33.825 33.029,38.146 33.454,38.571 36.396,38.571 36.496,38.471 36.496,37.275 36.505,37.225 36.533,37.183 36.708,37.008 36.75,36.98 36.8,36.971 37.396,36.971 37.521,36.846 37.521,34.5 37.53,34.45 37.558,34.408 38.733,33.233 38.775,33.205 38.825,33.196 43.15,33.196 43.2,33.205 43.242,33.233 44.942,34.933 44.97,34.975 44.979,35.025 44.979,35.55 44.97,35.6 44.942,35.642 43.529,37.054 43.529,42.796 48.854,48.121 54.321,48.121
70_GND on GP1 (split plane): 79.49,30.51 74.929,30.51 74.929,32.975 74.92,33.025 74.892,33.067 70.554,37.404 70.554,46.771 79.49,46.771
GND on GP1 (split plane): 79.49,47.029 70.497,47.029 70.475,47.045 70.425,47.054 70.375,47.045 70.333,47.017 70.305,46.975 70.296,46.925 70.296,37.35 70.305,37.3 70.333,37.258 74.671,32.921 74.671,30.51 50.554,30.51 50.554,32.575 50.545,32.625 50.517,32.667 50.417,32.767 46.604,36.579 46.604,41.696 46.729,41.821 52.1,41.821 52.15,41.83 52.192,41.858 53.892,43.558 53.92,43.6 53.929,43.65 53.929,45.75 53.929,46.171 54.742,46.983 54.77,47.025 54.779,47.075 54.779,47.975 54.77,48.025 54.742,48.067 54.467,48.342 54.425,48.37 54.375,48.379 48.8,48.379 48.75,48.37 48.708,48.342 43.308,42.942 43.28,42.9 43.271,42.85 43.271,37 43.28,36.95 43.308,36.908 44.721,35.496 44.721,35.079 43.096,33.454 38.879,33.454 37.779,34.554 37.779,36.9 37.77,36.95 37.742,36.992 37.542,37.192 37.5,37.22 37.45,37.229 36.854,37.229 36.754,37.329 36.754,38.525 36.745,38.575 36.717,38.617 36.542,38.792 36.5,38.82 36.45,38.829 33.4,38.829 33.35,38.82 33.308,38.792 32.808,38.292 32.78,38.25 32.771,38.2 32.771,33.879 31.946,33.054 30.51,33.054 30.51,49.49 79.49,49.49

## Other copper
GP1 (plane layer: these items are gaps in the copper):
  lines w0.254: 44.85,30.2 50.333,30.2 50.425,30.108 50.425,32.575 50.325,32.675 46.475,36.525 46.475,41.75 46.675,41.95 52.1,41.95 53.8,43.65 53.8,45.75 53.8,46.225 54.65,47.075 54.65,47.975 54.375,48.25 48.8,48.25 43.4,42.85 43.4,37 44.85,35.55 44.85,35.025 43.15,33.325 38.825,33.325 37.65,34.5 37.65,36.9 37.45,37.1 36.8,37.1 36.625,37.275 36.625,38.525 36.45,38.7 33.4,38.7 32.9,38.2 32.9,33.825 32,32.925 30.45,32.925 30.15,32.625 30.15,30.125 50.408,30.125 ; 70.425,37.35 74.8,32.975 74.8,30.275 79.775,30.275 79.8,30.3 79.8,46.879 79.779,46.9 79.65,46.9 70.45,46.9 70.425,46.925 70.425,37.35

## Silkscreen, mask and mechanical layers (free items; w line width, h text height)
Mechanical 13:
  the board outline again, w0.254